# Altium PCB untitled.PcbDoc
Units mm, origin at the board's own origin, x right, y up, seen from the top; angles counter-clockwise.
Board outline 19.93 x 25.26 mm, 2 copper layers (Top, Bottom); 7 components, 13 nets, 50 pads, 15 vias.
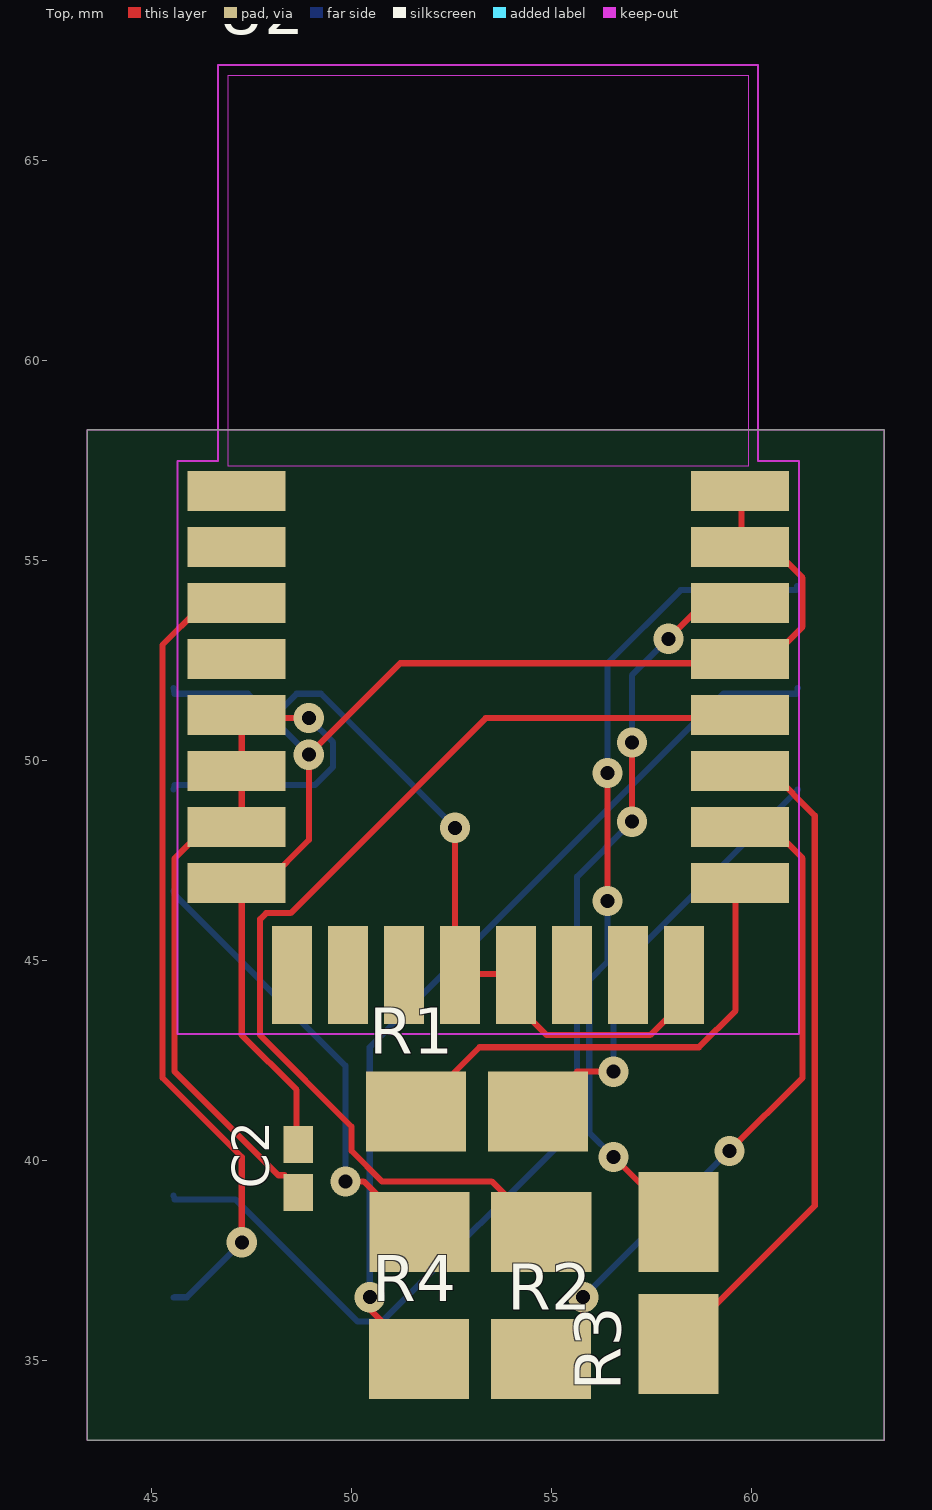
[diagram p0: Top view]
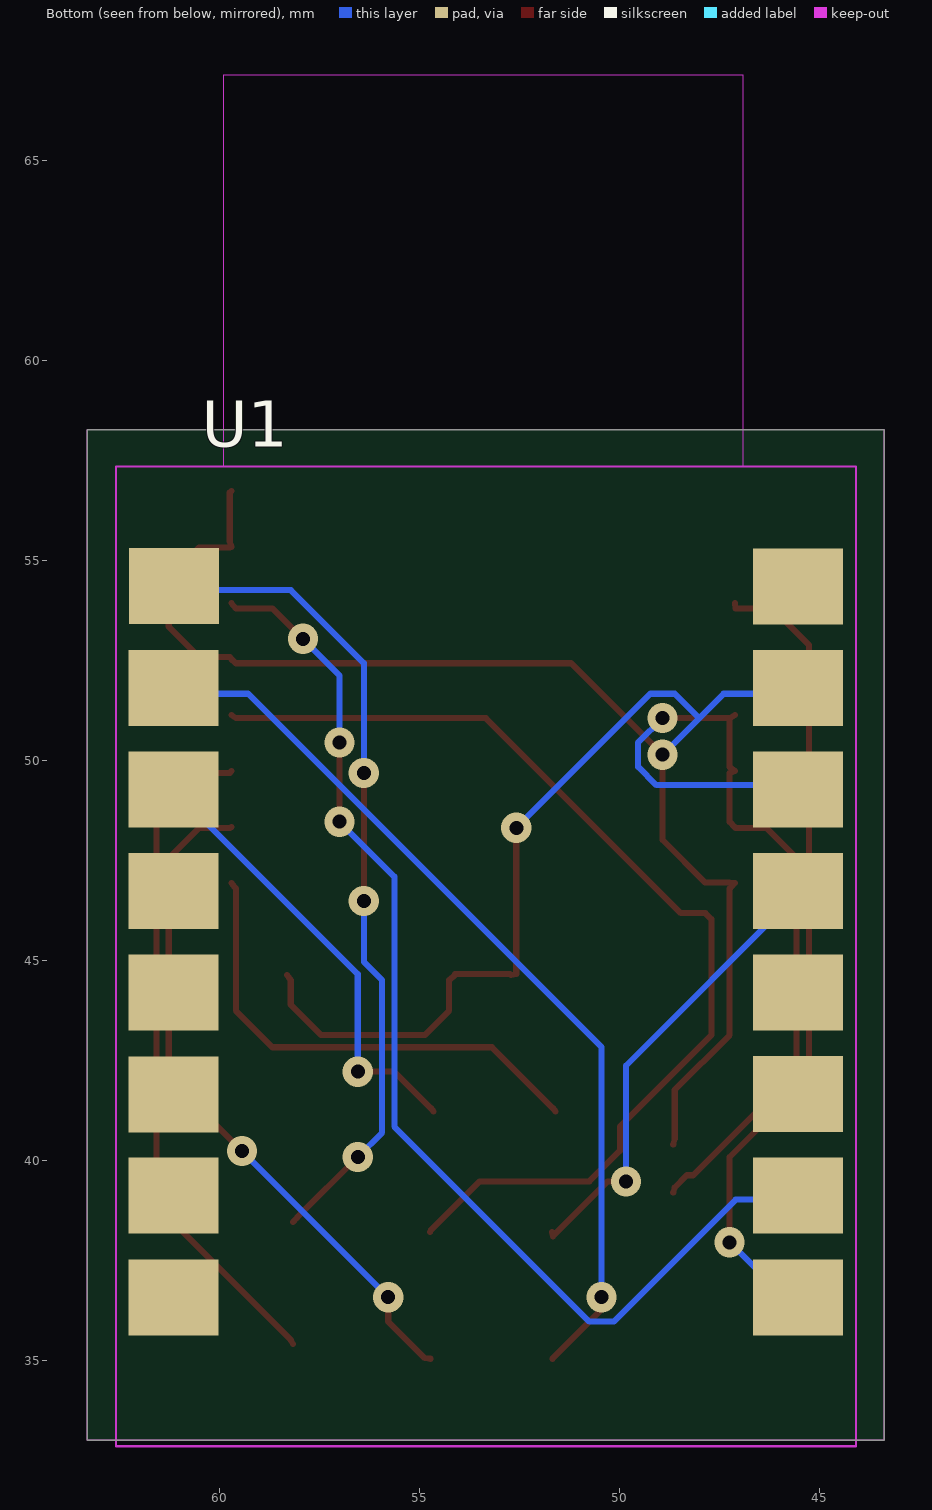
[diagram p1: Bottom view, seen from below]

## Layer stack, top to bottom
Top Solder: solder mask 0.0102, Solder Resist, Dk 3.5
Top: signal copper 0.035
Dielectric 1: dielectric 0.32, FR-4, Dk 4.8
Bottom: signal copper 0.035
Bottom Solder: solder mask 0.0102, Solder Resist, Dk 3.5

## Board outline
43.376,58.26 43.376,33 63.308,33 63.308,58.26

## Design rules (kind name [scope] priority, off if disabled: settings)
BoardOutlineClearance mdCopperDimension [All] p1: gap=0.254 ignorepadtopadclearanceinfootprint=FALSE except(0: Arc-SplitContinuation Track-SplitContinuation SMDPad-SplitContinuation THPad-SplitContinuation Via-SplitContinuation Fill-SplitContinuation Poly-SplitContinuation Region-SplitContinuation Text-SplitContinuation; 1.016: Poly-OutlineEdge Poly-CavityEdge Poly-CutoutEdge Poly-SplitBarrior)
Clearance "Clearance (Same Net)" [All] p1: gap=0.152 ignorepadtopadclearanceinfootprint=FALSE
Clearance [All] p2: gap=0.152 ignorepadtopadclearanceinfootprint=FALSE
HoleSize [All] p1: absolutevalues=TRUE maxlimit=2540 minlimit=0.35 maxpercent=80.000 minpercent=20.000
HoleToHoleClearance mdDrill [All] p1: gap=0.152 allowstackedmicrovias=TRUE
MinimumSolderMaskSliver [All] p1 off: minsoldermaskwidth=0.254
PasteMaskExpansion mlMinCreamFrame [All] p1: expansion=0
PolygonConnect ThermalVias [IsVia] p1: connectstyle=Direct reliefconductorwidth=0.254 reliefentries=4 polygonreliefangle="90 Angle" airgapwidth=0.254
PolygonConnect [All] p2: connectstyle=Relief reliefconductorwidth=0.254 reliefentries=4 polygonreliefangle="90 Angle" airgapwidth=0.254
RoutingVias [All] p1: holewidth=0.35 width=0.756 viastyle="Through Hole" minholewidth=0.35 minwidth=0.756 maxholewidth=2.54 maxwidth=2.54
SolderMaskExpansion mlMinStopFrame [All] p1: expansion=0.102 istentingtop=FALSE
Width [All] p1: maxlimit=0.254 minlimit=0.152 preferedwidth=0.152
26 further rules are at their usual default settings.

## Components (designator, comment, footprint, x,y, rotation, side; value= is the part's Value field where it differs from the comment)
C2 "" C0402K 48.653,39.792 r90 top
R1 "" SMK 53.12,41.216 r0 top
R2 "" SMK 53.207,38.209 r180 top
R3 "" SMK 58.16,36.931 r90 top
R4 "" SMK 53.199,35.037 r0 top
U1 "ESP32-C3_SUPERMINI" MODULE_ESP32-C3_SUPERMINI 53.34,44.45 r180 bottom
U2 "DWM3000TR13" XCVR_DWM3000TR13 53.406,55.78 r0 top

## Footprints (in the part's own frame and the unit in brackets; to place one, negate y for a bottom-side part, rotate by r counter-clockwise, add the part's x,y. Pads: shape width x height; smd on the part's side, far side on the other; paste and mask are expansions set on the pad)
C0402K [mm] "C0402K"
  rect 0.925x0.74 smd: 1(-0.6,0) 2(0.6,0)
MODULE_ESP32-C3_SUPERMINI [mm] "MODULE_ESP32-C3_SUPERMINI"
  rect 2.25x1.9 smd: 3V3(7.803,4.818) 5V(7.805,9.897) GND(7.803,7.36) GPIO0(7.803,-7.883) GPIO1(7.803,-5.335) GPIO2(7.803,-2.793) GPIO3(7.803,-0.258) GPIO4(7.803,2.283) GPIO5(-7.792,9.901) GPIO6(-7.804,7.356) GPIO7(-7.804,4.823) GPIO8(-7.804,2.278) GPIO9(-7.804,-0.256) GPIO10(-7.804,-2.801) GPIO20(-7.804,-5.334) GPIO21(-7.804,-7.879)
  Top keep-out lines w0.05: 9.25,-11.6 -9.25,-11.6 -9.25,12.9 9.25,12.9 9.25,-11.6
SMK [mm] "SMK"
  rect 2.5x2 smd: 1(1.524,0) 2(-1.524,0)
XCVR_DWM3000TR13 [mm] "XCVR_DWM3000TR13"
  rect 2.45x1 smd: 1(-6.295,0.95) 2(-6.295,-0.45) 3(-6.295,-1.85) 4(-6.295,-3.25) 5(-6.295,-4.65) 6(-6.295,-6.05) 7(-6.295,-7.45) 8(-6.295,-8.85) 17(6.295,-8.85) 18(6.295,-7.45) 19(6.295,-6.05) 20(6.295,-4.65) 21(6.295,-3.25) 22(6.295,-1.85) 23(6.295,-0.45) 24(6.295,0.95)
  rect 1x2.45 smd: 9(-4.9,-11.145) 10(-3.5,-11.145) 11(-2.1,-11.145) 12(-0.7,-11.145) 13(0.7,-11.145) 14(2.1,-11.145) 15(3.5,-11.145) 16(4.9,-11.145)
  Top keep-out region: -6.5,1.575 -6.5,11.35 6.5,11.35 6.5,1.575
  Top keep-out region: -6.5,1.575 -6.5,11.35 6.5,11.35 6.5,1.575
  Top keep-out lines w0.05: -7.77,-12.62 -7.77,1.7 -6.75,1.7 -6.75,11.6 6.75,11.6 6.75,1.7 7.77,1.7 7.77,-12.62 -7.77,-12.62
  Bottom keep-out region: -6.5,1.575 -6.5,11.35 6.5,11.35 6.5,1.575

## Part data
C2: library part C0402K, PackageName=C0402K
R1 R2 R3 R4: library part SMK, PackageName=SMK
U1: library part MODULE_ESP32-C3_SUPERMINI, PackageName=MODULE_ESP32-C3_SUPERMINI
U2: library part XCVR_DWM3000TR13, PackageName=XCVR_DWM3000TR13

## Via types
v1: diameter 0.756/0.756 (per signal layer), hole 0.35, Top to Bottom, 15 vias

## Nets (pads, with @x,y where several pads share a name; then routed paths per layer and width w, separated by ;. In a path a pad name is that pad's centre, name@x,y a point inside that pad or via, vN(x,y) a via of type N, cw(c..) or ccw(c..) an arc to the next point about the centre after c; other vN are vias at no path point)
0: C2.2 U1.GND U2.8 U2.12 U2.13 U2.16 U2.21 U2.23 U2.24 | length 51.6
  Top w0.152: C2.2 48.616,40.538 48.616,41.758 47.244,43.129 47.244,46.787 U2.8 47.244,46.939 47.854,46.939 48.92,48.006 v1(48.92,50.14) 51.206,52.426 59.588,52.426 U2.21 59.741,52.578 60.503,52.578 61.265,53.34 61.265,54.559 60.503,55.321 59.741,55.321 U2.23 59.741,55.474 59.741,56.693 U2.24 ; v1(52.578,48.311) 52.578,44.653 U2.12 52.73,44.653 54.102,44.653 U2.13 54.254,44.501 54.254,43.739 54.864,43.129 57.455,43.129 58.217,43.891 58.217,44.501 U2.16
  Bottom w0.152: U1.GND 45.568,51.664 47.396,51.664 48.006,51.054 ; v1(48.92,50.14) 48.006,51.054 ; v1(52.578,48.311) 49.225,51.664 48.616,51.664 48.006,51.054
5V: U1.5V
N$1: U1.GPIO1 U2.22 | length 28.8
  Top w0.152: v1(56.998,48.463) v1(56.998,50.444) ; v1(57.912,53.035) 58.674,53.797 59.588,53.797 U2.22
  Bottom w0.152: U1.GPIO1 45.568,39.014 47.092,39.014 50.14,35.966 50.749,35.966 55.626,40.843 55.626,47.092 v1(56.998,48.463) ; v1(56.998,50.444) 56.998,52.121 v1(57.912,53.035)
N$2: C2.1 U1.3V3 U2.5 U2.6 U2.7 | length 22.1
  Top w0.152: U2.5 U2.5@47.244,51.054 ; C2.1 48.616,39.319 48.311,39.624 48.158,39.624 45.568,42.215 45.568,47.549 46.33,48.311 47.092,48.311 U2.7 47.244,48.463 47.244,49.682 U2.6 47.244,49.835 U2.5@47.244,51.054 ; v1(48.92,51.054) U2.5@47.244,51.054
  Bottom w0.152: U1.3V3 45.568,49.378 49.073,49.378 49.53,49.835 49.53,50.444 v1(48.92,51.054)
N$3: U1.GPIO0 U2.3 | length 20.4
  Top w0.152: U2.3 47.092,53.797 46.177,53.797 45.263,52.883 45.263,42.062 47.244,40.081 v1(47.244,37.948)
  Bottom w0.152: U1.GPIO0 45.568,36.576 45.872,36.576 v1(47.244,37.948)
N$4: R1.2 U2.17 | length 12.3
  Top w0.152: R1.2 51.664,41.3 53.188,42.824 58.674,42.824 59.588,43.739 59.588,46.787 U2.17
N$5: R1.1 U1.GPIO7 | length 11.3
  Top w0.152: R1.1 54.712,41.3 55.626,42.215 v1(56.54,42.215)
  Bottom w0.152: v1(56.54,42.215) 56.54,44.653 61.112,49.225 U1.GPIO7
N$6: R2.2 U2.20 | length 26.4
  Top w0.152: R2.2 54.712,38.252 53.492,39.472 50.749,39.472 49.987,40.234 49.987,40.843 47.701,43.129 47.701,46.025 47.854,46.177 48.463,46.177 53.34,51.054 59.588,51.054 U2.20
N$7: R2.1 U1.GPIO4 | length 11.5
  Top w0.152: v1(49.835,39.472) 50.292,39.472 51.664,38.1 R2.1
  Bottom w0.152: U1.GPIO4 45.568,46.634 49.835,42.367 v1(49.835,39.472)
N$8: R3.2 U2.19 | length 16.9
  Top w0.152: R3.2 58.217,35.509 61.57,38.862 61.57,48.616 60.503,49.682 59.741,49.682 U2.19
N$9: R3.1 U1.GPIO5 | length 20.7
  Top w0.152: v1(56.388,46.482) v1(56.388,49.682) ; v1(56.54,40.081) 58.064,38.557 R3.1
  Bottom w0.152: v1(56.388,46.482) 56.388,44.958 55.931,44.501 55.931,40.691 v1(56.54,40.081) ; v1(56.388,49.682) 56.388,52.426 58.217,54.254 61.112,54.254 U1.GPIO5
N$10: R4.1 U2.18 | length 17.2
  Top w0.152: R4.1 54.864,35.052 55.778,35.966 v1(55.778,36.576) ; v1(59.436,40.234) 61.265,42.062 61.265,47.549 60.503,48.311 59.741,48.311 U2.18
  Bottom w0.152: v1(55.778,36.576) v1(59.436,40.234)
N$11: R4.2 U1.GPIO6 | length 22.8
  Top w0.152: v1(50.444,36.576) 50.444,36.271 51.664,35.052 R4.2
  Bottom w0.152: v1(50.444,36.576) 50.444,42.824 59.284,51.664 61.112,51.664 U1.GPIO6
pads on no net: U1.GPIO2 U1.GPIO3 U1.GPIO8 U1.GPIO9 U1.GPIO10 U1.GPIO20 U1.GPIO21 U2.1 U2.2 U2.4 U2.9 U2.10 U2.11 U2.14 U2.15

## Keep-outs
Keep-Out Layer:
  the board outline again, w0

## Silkscreen, mask and mechanical layers (free items; w line width, h text height)
Dimension:
  the board outline again, w0